# EAGLE board me433 (EAGLE 8.1.0)
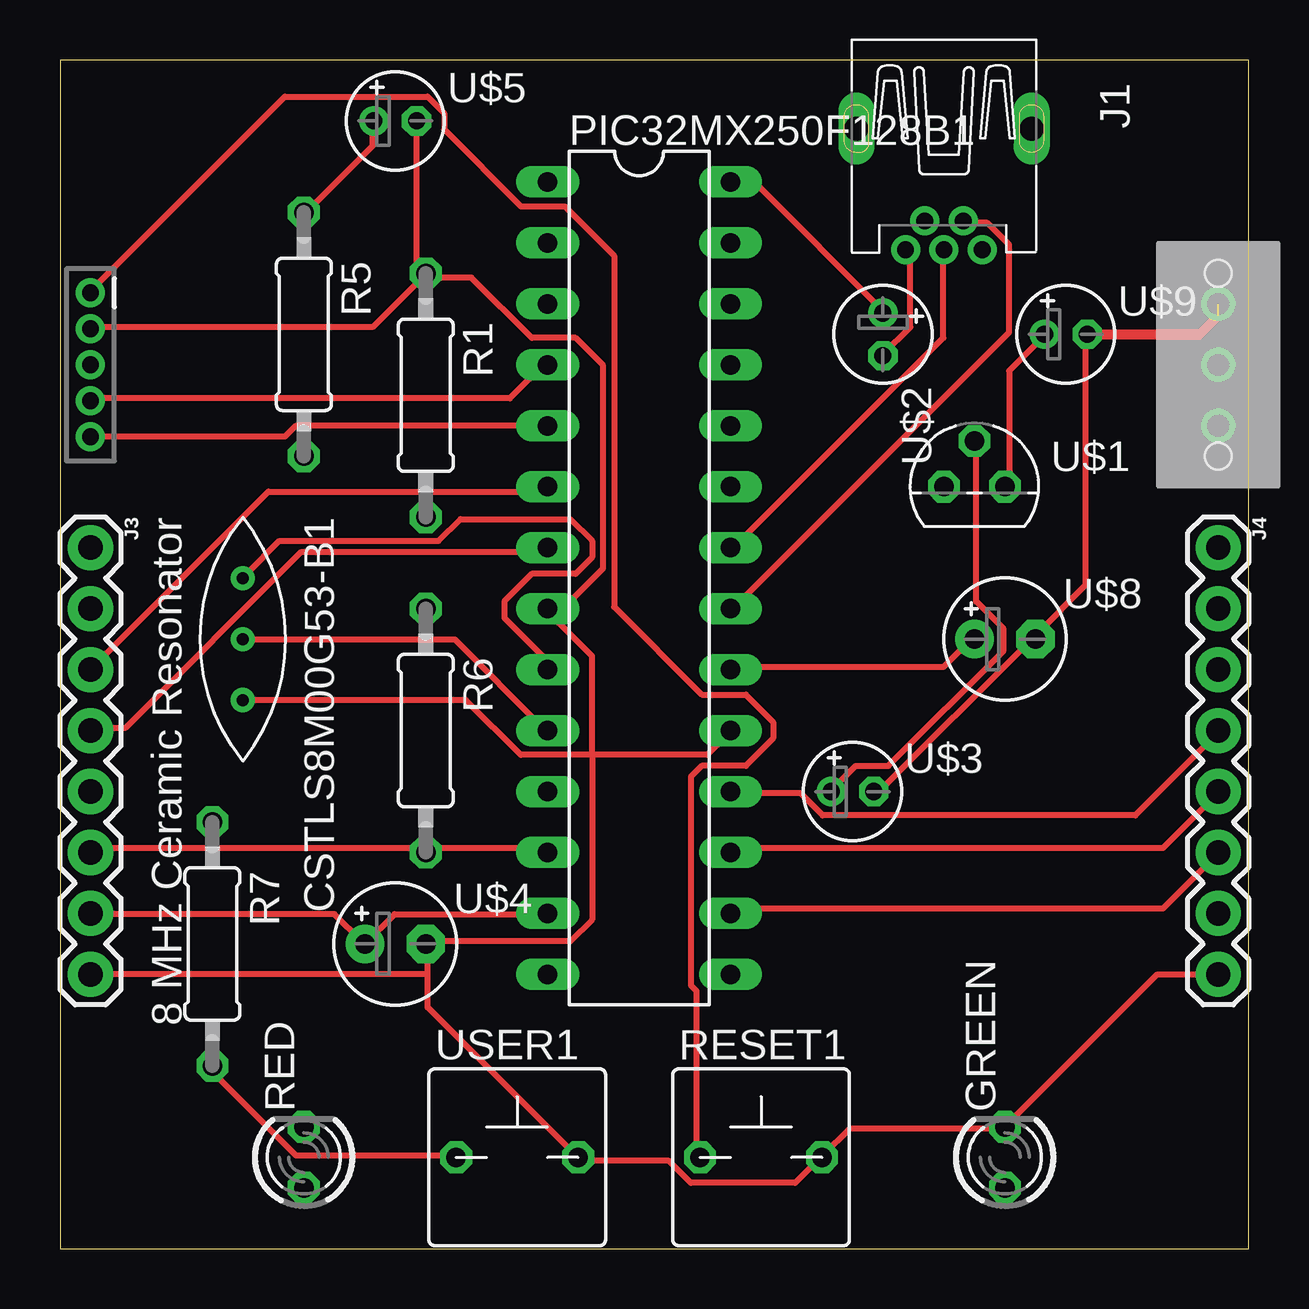
[diagram p0: board, top side]
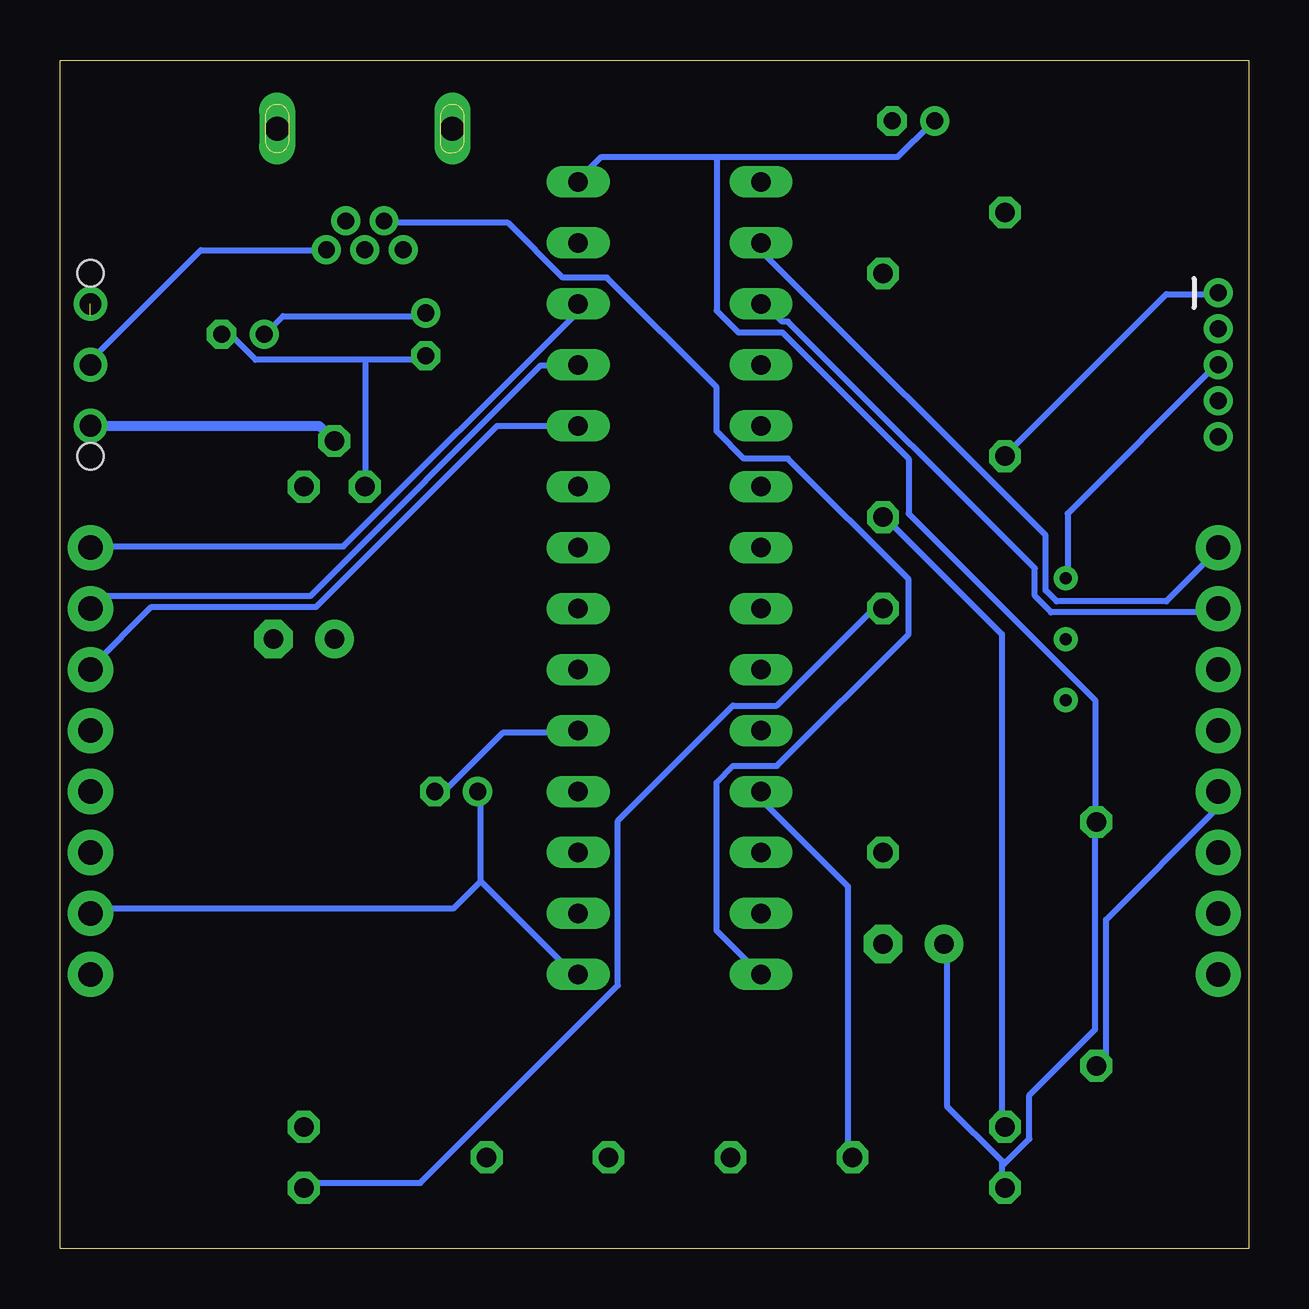
[diagram p1: board, bottom side, seen from below]

Size 49.53 x 49.53 mm. Coordinates in mm from the lower left corner, seen from the top.
Outline: 0,0 49.53,0 49.53,49.53 0,49.53 0,0
Copper layers (1*16): Top 0.035mm / dielectric 1.5mm / Bottom 0.035mm
Design rules "default": minimum track width 10mil, minimum drill 24mil, track to track 8mil, track to pad 8mil, pad to pad 8mil, via to via 8mil, smd to smd 8mil, copper to edge 40mil, drill to drill 8mil, minimum pad ring 10mil, minimum via ring 8mil, stop-mask expansion 4mil, vias tented up to drill 0mil, thermal gap 10mil

## Footprints (pad centres in the part's own frame; a part is rotated, then mirrored left to right if it is on the bottom)
CSTLS8M00G53-B0 = drill 0.5: P$1 0,0; P$2 2.54,0; P$3 -2.54,0
LED3MM = drill 0.813 octagon: A -1.27,0; K 1.27,0
32005-601 = drill 0.7 pad 1.016: 1 2.825,1.6; 2 1.625,0.8; 3 2.825,0; 4 1.625,-0.8; 5 2.825,-1.6 | drill 1 pad 1.422 long: M1 -2.225,3.65; M2 -2.225,-3.65
PIC_ICSP_MINI_5_PIN = drill 0.7: 1 -3,0; 2 -1.5,0; 3 0,0; 4 1.5,0; 5 3,0
1X08 = drill 1.016 pad 1.88: 1 0,0; 2 2.54,0; 3 5.08,0; 4 7.62,0; 5 10.16,0; 6 12.7,0; 7 15.24,0; 8 17.78,0
DIL28-3 = drill 0.813 long: 1 -16.51,-3.81; 2 -13.97,-3.81; 3 -11.43,-3.81; 4 -8.89,-3.81; 5 -6.35,-3.81; 6 -3.81,-3.81; 7 -1.27,-3.81; 8 1.27,-3.81; 9 3.81,-3.81; 10 6.35,-3.81; 11 8.89,-3.81; 12 11.43,-3.81; 13 13.97,-3.81; 14 16.51,-3.81; 15 16.51,3.81; 16 13.97,3.81; 17 11.43,3.81; 18 8.89,3.81; 19 6.35,3.81; 20 3.81,3.81; 21 1.27,3.81; 22 -1.27,3.81; 23 -3.81,3.81; 24 -6.35,3.81; 25 -8.89,3.81; 26 -11.43,3.81; 27 -13.97,3.81; 28 -16.51,3.81
0207/10 = drill 0.813 octagon: 1 -5.08,0; 2 5.08,0
BUTTON = drill 0.813 octagon: 1 -2.54,0; 2 2.54,0
TO92 = drill 0.813 octagon: 1 -1.27,0; 2 0,1.905; 3 1.27,0
E1,8-4 = drill 0.711 pad 1.168: + -0.889,0 | drill 0.711 pad 1.168 octagon: - 0.889,0
E2,5-5 = drill 0.813 pad 1.6: + -1.27,0 | drill 0.813 pad 1.6 octagon: - 1.27,0
ALCOSWITCH = drill 0.9 pad 1.27: P$1 0,0; P$2 2.54,0; P$3 -2.54,0 | hole 1.1: 3.81,0; -3.81,0

## Placement (x,y rotation side)
CSTLS8M00G53-B1  8 MHz Ceramic Resonator  [CSTLS8M00G53-B0]  7.62,25.4 270 top
GREEN  [LED3MM]  39.37,3.81 90 top
J1  USB_MINI-B  [32005-601]  36.83,44.45 270 top
J2  PIC_ICSP_MINI_5_PIN  [PIC_ICSP_MINI_5_PIN]  1.27,36.83 270 top
J3  [1X08]  1.27,29.21 270 top
J4  [1X08]  48.26,29.21 270 top
PIC32MX250F128B1  [DIL28-3]  24.13,27.94 270 top
R1  [0207/10]  15.24,35.56 270 top
R5  10 K Ohm  [0207/10]  10.16,38.1 270 top
R6  10 K Ohm  [0207/10]  15.24,21.59 270 top
R7  10 K Ohm  [0207/10]  6.35,12.7 270 top
RED  [LED3MM]  10.16,3.81 90 top
RESET1  BUTTON  [BUTTON]  29.21,3.81 0 top
U$1  MCP1702  [TO92]  38.1,31.75 0 top
U$2  CAP-4  [E1,8-4]  34.29,38.1 270 top
U$3  CAP-4  [E1,8-4]  33.02,19.05 0 top
U$4  CAP-5  [E2,5-5]  13.97,12.7 0 top
U$5  .1 uF  [E1,8-4]  13.97,46.99 0 top
U$6  SLIDE-SWITCH  [ALCOSWITCH]  48.26,36.83 90 top
U$8  10 uF  [E2,5-5]  39.37,25.4 0 top
U$9  .1 uF  [E1,8-4]  41.91,38.1 0 top
USER1  BUTTON  [BUTTON]  19.05,3.81 0 top

## Library data of the parts
CSTLS8M00G53-B1 GREEN J1 PIC32MX250F128B1 R1 R5-R7 RED RESET1 U$1-U$6 U$8 U$9 USER1 = ME433
J2 = SparkFun-Connectors; PROD_ID: CONN-08314; SF_ID: PRT-11264
J3 J4 = ME433; PROD_ID: CONN-08438

## Nets
GND: CSTLS8M00G53-B1.P$2 GREEN.K J1.5 J2.2 J3.8 J4.8 PIC32MX250F128B1.8 PIC32MX250F128B1.19 R1.1 RESET1.2 U$1.1 U$2.- U$3.- U$4.- U$5.- U$6.P$2 U$8.- U$9.- USER1.2
N$1: R1.2 RED.K
N$2: CSTLS8M00G53-B1.P$3 J2.3 PIC32MX250F128B1.9
N$3: CSTLS8M00G53-B1.P$1 PIC32MX250F128B1.10
N$4: J4.7 PIC32MX250F128B1.15 U$1.2 U$3.+ U$6.P$3
N$5: J1.2 PIC32MX250F128B1.21
N$6: J3.7 PIC32MX250F128B1.13 PIC32MX250F128B1.28 R5.1 R7.1 RED.A U$1.3 U$2.+ U$4.+ U$5.+ U$9.+
N$7: PIC32MX250F128B1.20 U$8.+
N$8: J2.4 PIC32MX250F128B1.4
N$9: GREEN.A R6.1
N$10: J3.3 PIC32MX250F128B1.6
N$11: J3.5 PIC32MX250F128B1.11 R7.2 USER1.1
N$12: J1.3 PIC32MX250F128B1.22
N$13: J1.4 PIC32MX250F128B1.14
N$14: J3.1 PIC32MX250F128B1.2
N$15: J2.5 PIC32MX250F128B1.5
N$16: J1.1 U$6.P$1
N$17: J4.6 PIC32MX250F128B1.16
N$19: J3.4 PIC32MX250F128B1.7
N$20: PIC32MX250F128B1.27
N$21: J3.6 PIC32MX250F128B1.12 R6.2
N$22: J4.1 PIC32MX250F128B1.26
N$23: J4.2 PIC32MX250F128B1.25
N$24: J4.3 PIC32MX250F128B1.24
N$26: J4.5 PIC32MX250F128B1.17
N$28: J4.4 PIC32MX250F128B1.18
N$29: J3.2 PIC32MX250F128B1.3
N$30: J2.1 R5.2 RESET1.1

## Tracks (layer width: path | path; a pad name or v marks a point on that pad's centre or on a via)
GND  (1 unrouted)
  Top 0.254: 15.32,11.43 15.32,10.06 21.49,3.89 USER1.2 21.72,3.66 25.38,3.66 26.29,2.74 30.63,2.74 31.55,3.66 RESET1.2 31.77,3.89 32.92,5.03 39.32,5.03 GREEN.K 45.72,11.43 J4.8 | 15.32,11.43 15.32,12.57 U$4.- 15.32,12.8 21.26,12.8 22.17,13.72 22.17,20.57 | 15.32,11.43 J3.8 | J2.2 1.37,38.41 13.03,38.41 15.09,40.46 R1.1 | U$5.- 14.86,40.92 15.09,40.69 R1.1 | J1.5 35.43,41.6 35.43,38.41 34.29,37.26 U$2.- | CSTLS8M00G53-B1.P$2 16.92,22.86 19.2,20.57 22.17,20.57 | 22.17,20.57 26.98,20.57 27.89,21.49 PIC32MX250F128B1.19 | 20.57,26.29 22.17,24.69 22.17,20.57 | 20.57,26.29 20.34,26.52 PIC32MX250F128B1.8 20.57,26.29 | U$3.- 34.06,18.97 40.46,25.38 U$8.- 40.69,25.6 42.75,27.66 42.75,37.95 U$9.- | 20.57,26.29 22.63,28.35 22.63,36.8 21.49,37.95 19.66,37.95 17.14,40.46 15.32,40.46 R1.1
  Top 0.406: U$9.- 47.49,38.1 48.26,38.87
  Bottom 0.254: 36.8,37.03 34.29,37.03 U$2.- | 36.8,37.03 41.38,37.03 42.29,37.95 42.75,37.95 U$9.- | 36.8,37.03 36.8,31.77 U$1.1 | U$3.- 33.83,19.2 33.38,19.2 31.09,21.49 28.12,21.49 PIC32MX250F128B1.19
N$1
  Bottom 0.254: RED.K 10.29,5.26 10.29,25.6 15.09,30.4 R1.2
N$2
  Top 0.254: PIC32MX250F128B1.9 20.12,24.23 20.12,24.69 18.52,26.29 18.52,26.98 19.66,28.12 21.49,28.12 22.17,28.8 22.17,29.49 21.26,30.4 16.69,30.4 15.77,29.49 9.14,29.49 7.77,28.12 CSTLS8M00G53-B1.P$3
  Bottom 0.254: CSTLS8M00G53-B1.P$3 7.54,28.12 7.54,30.63 1.37,36.8 J2.3
N$3
  Top 0.254: CSTLS8M00G53-B1.P$1 7.77,25.38 16.46,25.38 20.12,21.72 PIC32MX250F128B1.10
N$4
  Top 0.254: U$1.2 38.18,33.6 38.18,26.98 39.32,25.83 39.32,24.92 34.52,20.12 33.15,20.12 32.23,19.2 U$3.+
  Bottom 0.254: 32,15.32 32,18.97 U$3.+ | 32,15.32 28.12,11.43 PIC32MX250F128B1.15 | 32,15.32 33.15,14.17 48.23,14.17 J4.7
  Bottom 0.406: U$6.P$3 38.73,34.29 U$1.2
N$5
  Top 0.254: J1.2 37.72,42.75 38.63,42.75 39.55,41.83 39.55,38.18 28.12,26.75 PIC32MX250F128B1.21
N$6
  Top 0.254: PIC32MX250F128B1.13 20.12,13.95 13.95,13.95 U$4.+ 12.57,12.8 11.43,13.95 1.37,13.95 J3.7 | U$5.+ 13.03,46.86 13.03,45.95 10.29,43.2 R5.1 | PIC32MX250F128B1.28 28.12,44.35 29.03,44.35 34.29,39.09 U$2.+ | U$1.3 39.55,31.77 39.55,36.58 40.92,37.95 U$9.+
  Bottom 0.254: 10.29,3.43 10.29,3.66 12.57,5.94 12.57,12.57 U$4.+ | 10.29,3.43 10.29,2.74 RED.A | 10.29,3.43 9.14,4.57 9.14,6.4 6.4,9.14 6.4,17.6 R7.1 6.4,17.83 6.4,22.86 14.17,30.63 14.17,32.92 19.43,38.18 21.26,38.18 22.17,39.09 22.17,45.49 | U$2.+ 34.29,38.86 40.23,38.86 40.92,38.18 U$9.+ | 22.17,45.49 26.98,45.49 27.89,44.58 PIC32MX250F128B1.28 | 22.17,45.49 14.63,45.49 13.26,46.86 U$5.+
N$7
  Top 0.254: PIC32MX250F128B1.20 28.12,24.23 36.8,24.23 37.95,25.38 U$8.+
N$8
  Top 0.254: J2.4 1.37,35.43 18.75,35.43 20.12,36.8 PIC32MX250F128B1.4
N$9
  Bottom 0.254: R6.1 15.32,26.52 15.77,26.52 19.66,22.63 21.49,22.63 26.29,17.83 26.29,10.97 34.52,2.74 39.32,2.74 GREEN.A
N$10
  Top 0.254: J3.3 8.69,31.55 20.12,31.55 PIC32MX250F128B1.6
N$11
  Top 0.254: USER1.1 16.46,3.89 9.83,3.89 6.17,7.54 R7.2
  Bottom 0.254: PIC32MX250F128B1.11 20.12,18.97 20.12,18.52 16.69,15.09 16.69,3.89 USER1.1 | J3.5 1.37,18.97 1.37,18.29 5.94,13.72 5.94,8 6.17,7.77 R7.2
N$12
  Top 0.254: J1.3 36.8,41.6 36.8,37.95 28.12,29.26 PIC32MX250F128B1.22
N$13
  Bottom 0.254: J1.4 35.89,42.75 30.86,42.75 28.57,40.46 26.75,40.46 22.17,35.89 22.17,34.06 21.03,32.92 19.2,32.92 14.17,27.89 14.17,25.6 19.66,20.12 21.49,20.12 22.17,19.43 22.17,13.26 20.34,11.43 PIC32MX250F128B1.14
N$14
  Bottom 0.254: PIC32MX250F128B1.2 20.12,41.83 20.12,41.38 8.46,29.72 8.46,27.43 8,26.98 3.43,26.98 1.37,29.03 J3.1
N$15
  Top 0.254: PIC32MX250F128B1.5 9.83,34.29 9.37,33.83 1.37,33.83 J2.5
N$16
  Bottom 0.254: J1.1 38.63,41.6 43.66,41.6 48.23,37.03 U$6.P$1
N$17
  Top 0.254: PIC32MX250F128B1.16 28.12,14.17 45.95,14.17 48.23,16.46 J4.6
N$19
  Top 0.254: PIC32MX250F128B1.7 20.12,29.03 10.06,29.03 2.74,21.72 1.37,21.72 J3.4
N$21
  Top 0.254: PIC32MX250F128B1.12 20.12,16.69 15.32,16.69 R6.2 15.09,16.69 1.37,16.69 J3.6
N$22
  Bottom 0.254: PIC32MX250F128B1.26 28.12,39.32 28.12,38.86 37.72,29.26 48.23,29.26 J4.1
N$23
  Bottom 0.254: PIC32MX250F128B1.25 28.12,36.8 29.49,36.8 39.09,27.2 47.78,27.2 48.23,26.75 J4.2
N$24
  Bottom 0.254: PIC32MX250F128B1.24 31.32,34.29 38.86,26.75 45.72,26.75 48.23,24.23 J4.3
N$26
  Top 0.254: PIC32MX250F128B1.17 28.12,16.69 45.95,16.69 48.23,18.97 J4.5
N$28
  Top 0.254: PIC32MX250F128B1.18 28.12,18.97 30.86,18.97 31.77,18.06 44.81,18.06 48.23,21.49 J4.4
N$29
  Bottom 0.254: PIC32MX250F128B1.3 20.12,39.32 19.43,38.63 19.2,38.63 8.91,28.35 8.91,27.2 8.23,26.52 1.37,26.52 J3.2
N$30
  Top 0.254: RESET1.1 26.52,3.89 26.52,10.74 26.29,10.97 26.29,19.66 26.75,20.12 28.57,20.12 29.72,21.26 29.72,21.95 28.57,23.09 26.75,23.09 23.09,26.75 23.09,41.38 21.03,43.43 19.2,43.43 16,46.63 16,47.32 15.32,48.01 9.37,48.01 1.37,40.01 J2.1
  Bottom 0.254: J2.1 1.37,39.78 3.43,39.78 10.06,33.15 R5.2